# Altium PCB SolarArray1.PcbDoc
Units mm, origin at the board's own origin, x right, y up, seen from the top; angles counter-clockwise.
Board outline 82 x 320 mm, 2 copper layers (Top Layer, Bottom Layer), stack 1.567 mm thick; 65 components, 37 nets, 164 pads, 3 vias.
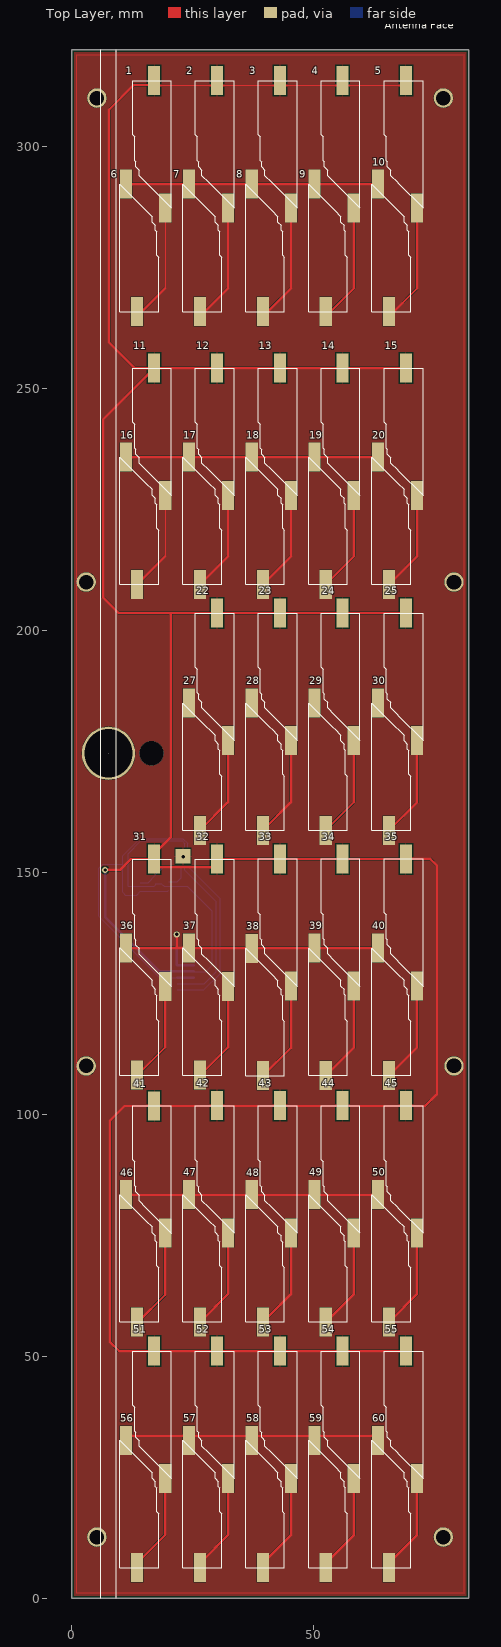
[diagram p0: Top Layer view]
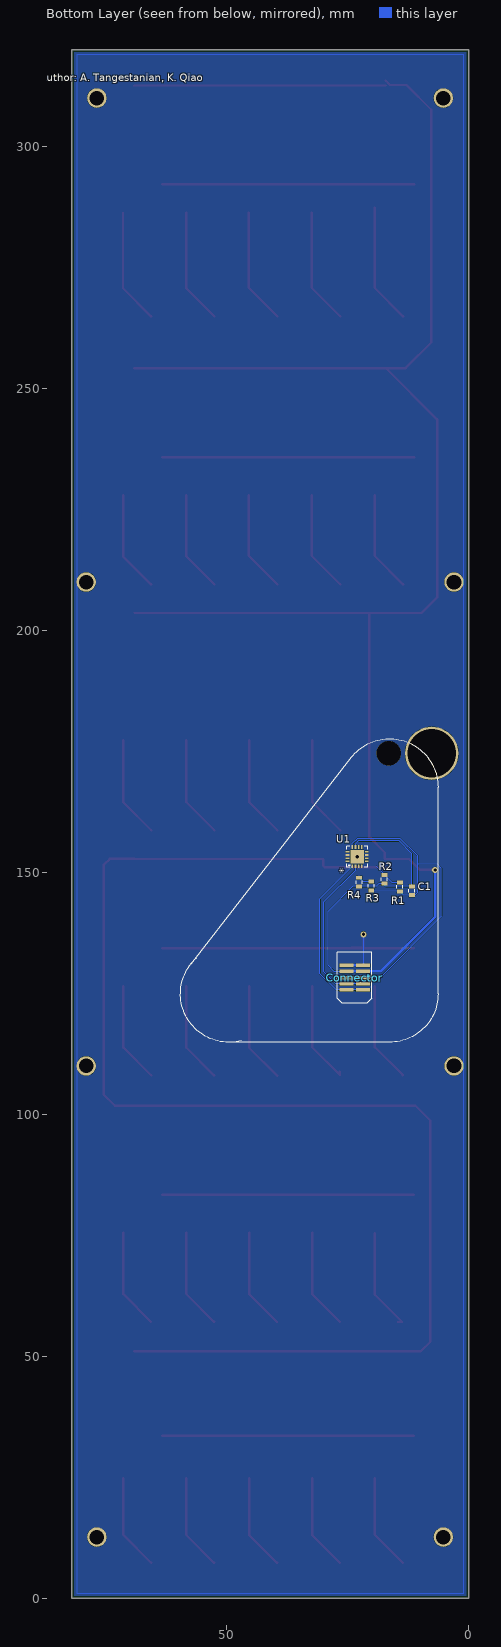
[diagram p1: Bottom Layer view, seen from below]
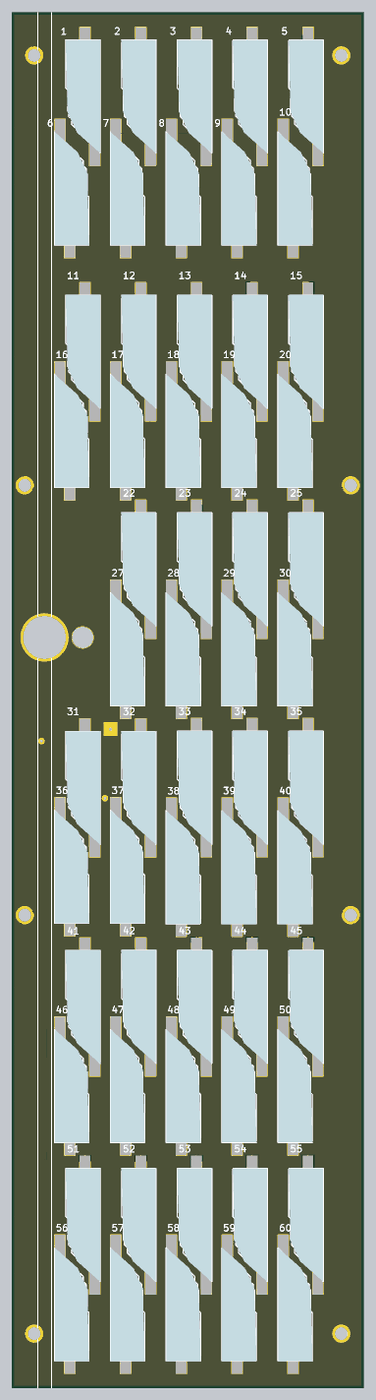
[diagram p2: 3D render of the assembled board from above, using the file's embedded part models]

## Layer stack, top to bottom
Top Solder: solder mask 0.0102, Solder Resist, Dk 3.5
Top Layer: signal copper 0.0356
Dielectric 1: dielectric 1.4961, FR-4, Dk 4.8
Bottom Layer: signal copper 0.0356
Bottom Solder: solder mask 0.0102, Solder Resist, Dk 3.5

## Board outline
82,0 82,320 0,320 0,0

## Design rules (kind name [scope] priority, off if disabled: settings)
Clearance Clearance(top_overlay) [OnLayer('Top Overlay') vs OnLayer('Top Overlay')] p1 off: gap=0.254 ignorepadtopadclearanceinfootprint=FALSE except(0: Arc-Hole Track-Hole SMDPad-Hole THPad-Hole Via-Hole Fill-Hole Poly-Hole Region-Hole Text-Hole)
Clearance Clearance(bottom) [OnLayer('Bottom Layer') vs OnLayer('Bottom Layer')] p2 off: gap=0.254 ignorepadtopadclearanceinfootprint=FALSE except(0: Arc-Hole Track-Hole SMDPad-Hole THPad-Hole Via-Hole Fill-Hole Poly-Hole Region-Hole Text-Hole)
Clearance Clearance(top) [OnLayer('Top Layer') vs OnLayer('Top Layer')] p3 off: gap=0.254 ignorepadtopadclearanceinfootprint=FALSE except(0: Arc-Hole Track-Hole SMDPad-Hole THPad-Hole Via-Hole Fill-Hole Poly-Hole Region-Hole Text-Hole)
PolygonConnect [All] p1: connectstyle=Relief reliefconductorwidth=0.254 reliefentries=4 polygonreliefangle="90 Angle" airgapwidth=0.254
RoutingVias [All] p1: holewidth=0.711 width=1.27 viastyle="Through Hole" minholewidth=0.711 minwidth=1.27 maxholewidth=0.711 maxwidth=1.27
SolderMaskExpansion [All] p1: expansion=0.102
Width [All] p1: maxlimit=1 minlimit=0.254 preferedwidth=0.254 minimp=50.000000 maximp=50.000000 favimp=50.000000
30 further rules are at their usual default settings.

## Components (designator, comment, footprint, x,y, rotation, side; value= is the part's Value field where it differs from the comment)
1 "Trisol X Solar Wing" PCBComponent_1 20.6,284.136 r90 top
2 "Trisol X Solar Wing" PCBComponent_1 33.6,284.136 r90 top
3 "Trisol X Solar Wing" PCBComponent_1 46.6,284.136 r90 top
4 "Trisol X Solar Wing" PCBComponent_1 59.556,284.136 r90 top
5 "Trisol X Solar Wing" PCBComponent_1 72.6,284.136 r90 top
6 "Trisol X Solar Wing" PCBComponent_1 9.944,295.364 r270 top
7 "Trisol X Solar Wing" PCBComponent_1 22.944,295.364 r270 top
8 "Trisol X Solar Wing" PCBComponent_1 35.944,295.364 r270 top
9 "Trisol X Solar Wing" PCBComponent_1 48.944,295.364 r270 top
10 "Trisol X Solar Wing" PCBComponent_1 62,295.364 r270 top
11 "Comment" PCBComponent_1 20.6,224.736 r90 top
12 "Trisol X Solar Wing" PCBComponent_1 33.6,224.736 r90 top
13 "Trisol X Solar Wing" PCBComponent_1 46.6,224.736 r90 top
14 "Trisol X Solar Wing" PCBComponent_1 59.556,224.736 r90 top
15 "Trisol X Solar Wing" PCBComponent_1 72.6,224.736 r90 top
16 "Comment" PCBComponent_1 9.944,238.964 r270 top
17 "Trisol X Solar Wing" PCBComponent_1 22.944,238.964 r270 top
18 "Trisol X Solar Wing" PCBComponent_1 35.944,238.964 r270 top
19 "Trisol X Solar Wing" PCBComponent_1 48.944,238.964 r270 top
20 "Trisol X Solar Wing" PCBComponent_1 62,238.964 r270 top
22 "Trisol X Solar Wing" PCBComponent_1 33.6,174.136 r90 top
23 "Trisol X Solar Wing" PCBComponent_1 46.6,174.136 r90 top
24 "Trisol X Solar Wing" PCBComponent_1 59.556,174.136 r90 top
25 "Trisol X Solar Wing" PCBComponent_1 72.6,174.136 r90 top
27 "Trisol X Solar Wing" PCBComponent_1 22.944,188.164 r270 top
28 "Trisol X Solar Wing" PCBComponent_1 35.944,188.164 r270 top
29 "Trisol X Solar Wing" PCBComponent_1 48.944,188.164 r270 top
30 "Trisol X Solar Wing" PCBComponent_1 62,188.164 r270 top
31 "Trisol X Solar Wing" PCBComponent_1 20.6,123.3 r90 top
32 "Trisol X Solar Wing" PCBComponent_1 33.6,123.3 r90 top
33 "Trisol X Solar Wing" PCBComponent_1 46.6,123.336 r90 top
34 "Trisol X Solar Wing" PCBComponent_1 59.556,123.336 r90 top
35 "Trisol X Solar Wing" PCBComponent_1 72.6,123.336 r90 top
36 "Trisol X Solar Wing" PCBComponent_1 9.944,137.564 r270 top
37 "Trisol X Solar Wing" PCBComponent_1 22.944,137.564 r270 top
38 "Trisol X Solar Wing" PCBComponent_1 35.944,137.464 r270 top
39 "Trisol X Solar Wing" PCBComponent_1 48.944,137.5 r270 top
40 "Trisol X Solar Wing" PCBComponent_1 62,137.5 r270 top
41 "Trisol X Solar Wing" PCBComponent_1 20.6,72.3 r90 top
42 "Trisol X Solar Wing" PCBComponent_1 33.6,72.336 r90 top
43 "Trisol X Solar Wing" PCBComponent_1 46.6,72.336 r90 top
44 "Trisol X Solar Wing" PCBComponent_1 59.556,72.336 r90 top
45 "Trisol X Solar Wing" PCBComponent_1 72.6,72.336 r90 top
46 "Trisol X Solar Wing" PCBComponent_1 9.944,86.564 r270 top
47 "Trisol X Solar Wing" PCBComponent_1 22.944,86.592 r270 top
48 "Trisol X Solar Wing" PCBComponent_1 35.944,86.564 r270 top
49 "Trisol X Solar Wing" PCBComponent_1 48.944,86.592 r270 top
50 "Trisol X Solar Wing" PCBComponent_1 62,86.592 r270 top
51 "Trisol X Solar Wing" PCBComponent_1 20.6,21.6 r90 top
52 "Trisol X Solar Wing" PCBComponent_1 33.6,21.6 r90 top
53 "Trisol X Solar Wing" PCBComponent_1 46.6,21.6 r90 top
54 "Trisol X Solar Wing" PCBComponent_1 59.556,21.6 r90 top
55 "Trisol X Solar Wing" PCBComponent_1 72.6,21.6 r90 top
56 "Trisol X Solar Wing" PCBComponent_1 9.944,35.8 r270 top
57 "Trisol X Solar Wing" PCBComponent_1 22.944,35.8 r270 top
58 "Trisol X Solar Wing" PCBComponent_1 35.944,35.8 r270 top
59 "Trisol X Solar Wing" PCBComponent_1 48.944,35.8 r270 top
60 "Trisol X Solar Wing" PCBComponent_1 62,35.8 r270 top
C1 "100pF" 0805 11.7,146.2 r270 bottom
Connector "TFC-105-02-F-D" TFC-105-X2-XX-D 23.529,128.26 r270 bottom
R1 "1K" 0805 14.2,147 r270 bottom
R2 "1K" 0805 17.4,148.6 r270 bottom
R3 "1K" 0805 20.1,147.2 r270 bottom
R4 "1K" 0805 22.6,148 r270 bottom
U1 "ADT7420UCPZ-R2" CP_16_17 23.025,153.268 r90 bottom

## Footprints (in the part's own frame and the unit in brackets; to place one, negate y for a bottom-side part, rotate by r counter-clockwise, add the part's x,y. Pads: shape width x height; smd on the part's side, far side on the other; paste and mask are expansions set on the pad)
0805 [mil]
  rect 32x48 smd: 1(-35.43,0) 2(36,0)
  silkscreen extent -12,-24 12,24
CP_16_17 [mil]
  rect 30x14 smd: 1(-77.5,38.39) 2(-77.5,12.8) 3(-77.5,-12.8) 4(-77.5,-38.39) 9(77.5,-38.39) 10(77.5,-12.8) 11(77.5,12.8) 12(77.5,38.39)
  rect 14x30 smd: 5(-38.39,-77.5) 6(-12.8,-77.5) 7(12.8,-77.5) 8(38.39,-77.5) 13(38.39,77.5) 14(12.8,77.5) 15(-12.8,77.5) 16(-38.39,77.5)
  rect 110x110 smd paste-54.5: 17(0,0)
  silkscreen extent -86,-86 86,86, body extent -81,-81 81,81, height 30
PCBComponent_1 [mm]
  rect 6x2.5 smd: 0(3.164,1.27) 1(29.464,3.556)
  silkscreen extent 3.16,0 29.46,8.03, body extent 3.16,0.06 29.46,8.06, height 0.32
TFC-105-X2-XX-D [mil]
  rect 29x115 smd mask+2: 1(-100,-67.5) 2(-100,67.5) 3(-50,-67.5) 4(-50,67.5) 5(0,-67.5) 6(0,67.5) 7(50,-67.5) 8(50,67.5) 9(100,-67.5) 10(100,67.5)
  silkscreen extent -208,-140 208,140, body extent -192,-122 183,113, height 220

## Part data
11 16: library part "Trisol X Solar Wing"
14 15 19 20: library part TrisolXWing
C1: library part CAP0805_1nF
R1 R2 R3 R4: library part RESISTOR0805-RES_1K
U1: "Imported"

## Free pads (board coordinates)
  round 5 hole 5: 1(16.5,174.6)
  round 4 hole 3: 2(5.2,12.65) 3(3,110) 4(3,210) 5(5.2,310) 6(76.8,12.65) 7(79,110) 8(79,210) 9(76.8,310)
  rect 3x3 smd paste-1.384: 10(23,153.3)
  round 11 hole 10: 12(7.6,174.6)

## Via types
v1: diameter 1.27, hole 0.711, Top Layer to Bottom Layer, 3 vias

## Nets (pads, with @x,y where several pads share a name; then routed paths per layer and width w, separated by ;. In a path a pad name is that pad's centre, name@x,y a point inside that pad or via, vN(x,y) a via of type N, cw(c..) or ccw(c..) an arc to the next point about the centre after c; other vN are vias at no path point)
Net1_0: 1.0 6.1 | length 24.8
  Top Layer w0.508: 6.1@13.5,264.9 19.386,270.786 1.0@19.386,287.3
Net1_1: 1.1 2.1 3.1 4.1 5.1 11.1 12.1 13.1 14.1 15.1 22.1 23.1 24.1 25.1 31.1 32.1 33.1 34.1 35.1 41.1 42.1 43.1 44.1 45.1 51.1 52.1 53.1 54.1 55.1 C1.1 Connector.3 Connector.4 pad.10 R2.2 R4.2 U1.11 U1.17 | length 728.6
  Top Layer w0.508: v1(6.9,150.5) 10,150.5 12.264,152.764 31.1 17.3,152.764 17.3,154.1 20.5,157.3 20.5,203.5 20.4,203.6 ; 31.1@17.1,151.1 29.7,151.1 30.044,151.444 32.1 69.008,152.764 35.1 74.1,152.8 75.4,151.5 75.4,104.1 73.1,101.8 45.1 44.1 43.1 42.1 11,101.8 7.9,98.7 7.9,53 9.836,51.064 51.1 52.1 53.1 54.1 55.1 ; 1.1@17.1,312.6 5.1@69.114,312.6 ; 1.1@17.1,313.6 16.2,312.7 12.8,312.7 7.7,307.6 7.7,259.5 13,254.2 11.1 11.1@17.1,254.2 ; 25.1@69,203.6 20.4,203.6 ; 15.1@69.1,254.2 15.1 14.1 13.1 12.1 11.1@17.1,254.2 ; 11.1@17.1,254.2 6.5,243.6 6.5,206.8 9.7,203.6 20.4,203.6
  Bottom Layer w0.254: U1.11 23.35,155.95 22.8,156.5 14.3,156.5 11.7,153.9 C1.1 17.1,147.1 17.4,147.4 R2.2 18.514,147.686 19.114,147.086 R4.2 23.914,147.086 29,142 29,130.8 27.7,129.5 25.273,129.5 Connector.3
  Bottom Layer w0.508: v1(6.9,150.5) 6.9,140.8 18.17,129.53 Connector.3
  other v1: 23.025,153.268
Net2_0: 2.0 7.1 | length 23.8
  Top Layer w0.508: 7.1@26.5,264.9 32.386,270.786 2.0@32.386,286.3
Net3_0: 3.0 8.1 | length 23.8
  Top Layer w0.508: 8.1@39.5,264.9 45.386,270.786 3.0@45.386,286.3
Net4_0: 4.0 9.1 | length 23.8
  Top Layer w0.508: 9.1@52.5,264.9 58.286,270.686 4.0@58.286,286.3
Net5_0: 5.0 10.1 | length 23.8
  Top Layer w0.508: 10.1@65.6,264.9 71.4,270.7 5.0@71.4,286.3
Net6_0: 6.0 7.0 8.0 9.0 10.0 16.0 17.0 18.0 19.0 20.0 27.0 28.0 29.0 30.0 36.0 37.0 38.0 39.0 40.0 46.0 47.0 48.0 49.0 50.0 56.0 57.0 58.0 59.0 60.0 Connector.1 Connector.2 | length 275.5
  Top Layer w0.508: 16.0 17.0 18.0 19.0 20.0 20.0@63.314,235.8 ; 6.0 7.0 8.0 9.0 10.0 10.0@63.314,292.2 ; 56.0@11.27,33.636 60.0@63.27,33.636 ; 36.0@11.27,134.4 11.334,134.336 39.0 40.0 ; 46.0@11.314,83.4 11.342,83.428 47.0 49.0 50.0 50.0@63.328,83.428 ; v1(21.7,137.2) 21.7,134.4 37.0 37.0@24.27,134.4
  Bottom Layer w0.254: Connector.2@21.7,130.914 Connector.2
  Bottom Layer w0.508: Connector.2@21.7,130.914 v1(21.7,137.2) ; Connector.2 Connector.1
Net11_0: 11.0 16.1 | length 20.8
  Top Layer w0.508: 16.1 19.386,215.386 11.0@19.386,227.9
Net12_0: 12.0 17.1 | length 20.8
  Top Layer w0.508: 17.1 32.386,215.386 12.0@32.386,227.9
Net13_0: 13.0 18.1 | length 20.8
  Top Layer w0.508: 18.1 45.386,215.386 13.0@45.386,227.9
Net14_0: 14.0 19.1 | length 20.8
  Top Layer w0.508: 19.1 58.286,215.286 14.0
Net15_0: 15.0 20.1 | length 20.8
  Top Layer w0.508: 20.1@65.6,209.5 71.386,215.286 15.0@71.386,227.9
Net21_0: 
Net22_0: 22.0 27.1 | length 21
  Top Layer w0.508: 27.1 32.33,164.53 22.0
Net23_0: 23.0 28.1 | length 21
  Top Layer w0.508: 28.1 45.33,164.53 23.0
Net24_0: 24.0 29.1 | length 21
  Top Layer w0.508: 29.1 58.286,164.486 24.0
Net25_0: 25.0 30.1 | length 21
  Top Layer w0.508: 30.1 71.33,164.474 25.0
Net31_0: 31.0 36.1 | length 20.8
  Top Layer w0.508: 36.1@13.556,108.1 19.33,113.874 31.0
Net32_0: 32.0 37.1 | length 21.2
  Top Layer w0.508: 37.1@26.556,108.1 32.33,113.874 32.0 ; 37.1@26.6,108.3 37.1@26.6,108.78
Net33_0: 33.0 38.1 | length 20.9
  Top Layer w0.508: 38.1@39.556,108 45.33,113.774 33.0
Net34_0: 34.0 39.1 | length 20.9
  Top Layer w0.508: 39.1@52.556,108.036 58.33,113.81 34.0@58.33,126.5
Net35_0: 35.0 40.1 | length 20.9
  Top Layer w0.508: 40.1 71.33,113.81 35.0
Net41_0: 41.0 46.1 | length 21.6
  Top Layer w0.508: 46.1@14.6,57.1 13.7,57.1 19.33,62.73 41.0
Net42_0: 42.0 47.1 | length 20.8
  Top Layer w0.508: 47.1@26.57,57.128 32.33,62.888 42.0
Net43_0: 43.0 48.1 | length 20.8
  Top Layer w0.508: 48.1@39.57,57.1 45.33,62.86 43.0
Net44_0: 44.0 49.1 | length 20.8
  Top Layer w0.508: 49.1@52.57,57.128 58.33,62.888 44.0@58.33,75.5
Net45_0: 45.0 50.1 | length 20.7
  Top Layer w0.508: 50.1@65.614,57.128 71.33,62.844 45.0
Net51_0: 51.0 56.1 | length 19.8
  Top Layer w0.508: 56.1@13.556,7.336 19.33,13.11 51.0
Net52_0: 52.0 57.1 | length 19.8
  Top Layer w0.508: 57.1@26.556,7.336 32.33,13.11 52.0
Net53_0: 53.0 58.1 | length 19.8
  Top Layer w0.508: 58.1@39.556,7.336 45.33,13.11 53.0
Net54_0: 54.0 59.1 | length 19.8
  Top Layer w0.508: 59.1@52.556,7.336 58.33,13.11 54.0@58.33,24.764
Net55_0: 55.0 60.1 | length 19.8
  Top Layer w0.508: 60.1@65.556,7.336 71.33,13.11 55.0
NetC1_2: C1.2 Connector.5 Connector.6 R1.2 R3.2 U1.12 | length 74
  Bottom Layer w0.254: R3.2 19.9,146.086 R1.2 13.4,145.286 C1.2 11.114,145.286 10.5,145.9 10.5,151.7 ; Connector.6 18.24,128.26 5.6,140.9 5.6,150.9 6.4,151.7 10.5,151.7 ; U1.12 24,156 23,157 14.1,157 10.5,153.4 10.5,151.7
  Bottom Layer w0.508: Connector.6 Connector.5
NetConnector_7: Connector.7 Connector.8 U1.2 | length 33.6
  Bottom Layer w0.254: Connector.8 27.39,126.99 29.9,129.5 29.9,143.9 23.35,150.45 U1.2
NetConnector_9: Connector.9 Connector.10 U1.1 | length 35.3
  Bottom Layer w0.254: Connector.10 27.32,125.72 30.7,129.1 30.7,144.6 U1.1
NetR1_1: R1.1 R2.1 U1.4 | length 9.3
  Bottom Layer w0.254: R1.1 15.8,147.9 R2.1 17.4,149.6 19.1,151.3 U1.4
NetR3_1: R3.1 R4.1 U1.3 | length 5.3
  Bottom Layer w0.254: R3.1 21.8,148.1 R4.1 22.6,151.2 U1.3
pads on no net: U1.5 U1.6 U1.7 U1.8 U1.9 U1.10 U1.13 U1.14 U1.15 U1.16

## Polygon pours and split planes (outlines as drawn)
no net on Bottom Layer (solid, pour order 16): 0.5,319.5 81.5,319.5 81.5,0.5 0.5,0.5
Net6_0 on Bottom Layer "Array_neg" (solid, shelved, pour order 4): 81,1 1,1 1,319 81,319
no net on Top Layer (solid, pour order 14): 3.6,317.6
no net on Top Layer (solid, pour order 12): 2.8,318.3
Net1_1 on Top Layer (solid, pour order 10): 0.5,319.5 81.5,319.5 81.5,0.5 0.5,0.5
Net6_0 on Top Layer "Array_pos" (solid, shelved, pour order 2): 81,1 1,1 1,319 81,319

## Silkscreen, mask and mechanical layers (free items; w line width, h text height)
Top Overlay:
  lines w0.254: 6.011,0 6.011,320 ; 9.21,0 9.21,320 ; 24.674,158.7 29.644,158.7 ; 7.6,174.6 7.6,174.6
  text "Antenna Face" at 64.7,324.3 h1.52
Bottom Overlay:
  lines w0.025: 46.931,115.241 ccw(c49.519,124.9) 56.129,132.404 ; 49.519,114.9 16.3,114.9 cw(c16.3,124.9) 6.3,124.9 6.3,167.611 cw(c16.3,167.61) 24.194,173.75 57.413,131.039
  text "Author: A. Tangestanian, K. Qiao" at 88.7,313.5 h1.52

## Text inside footprints (layer, text, board x,y; h text height)
Connector: Mechanical 1 "J1" at 28.304,128.706 h0.76 r90
U1: Bottom Overlay "*" at 25.184,149.839 h1.52 r270